# Altium PCB PCB_REV2.PcbDoc (part 2 of 2)
Units mm, origin at the board's own origin, x right, y up, seen from the top; angles counter-clockwise.
Board outline 152.4 x 101.6 mm, 2 copper layers (Top Layer, Bottom Layer); 215 components, 186 nets, 583 pads, 0 vias.
Unrouted connection lines stored in the file: 258.
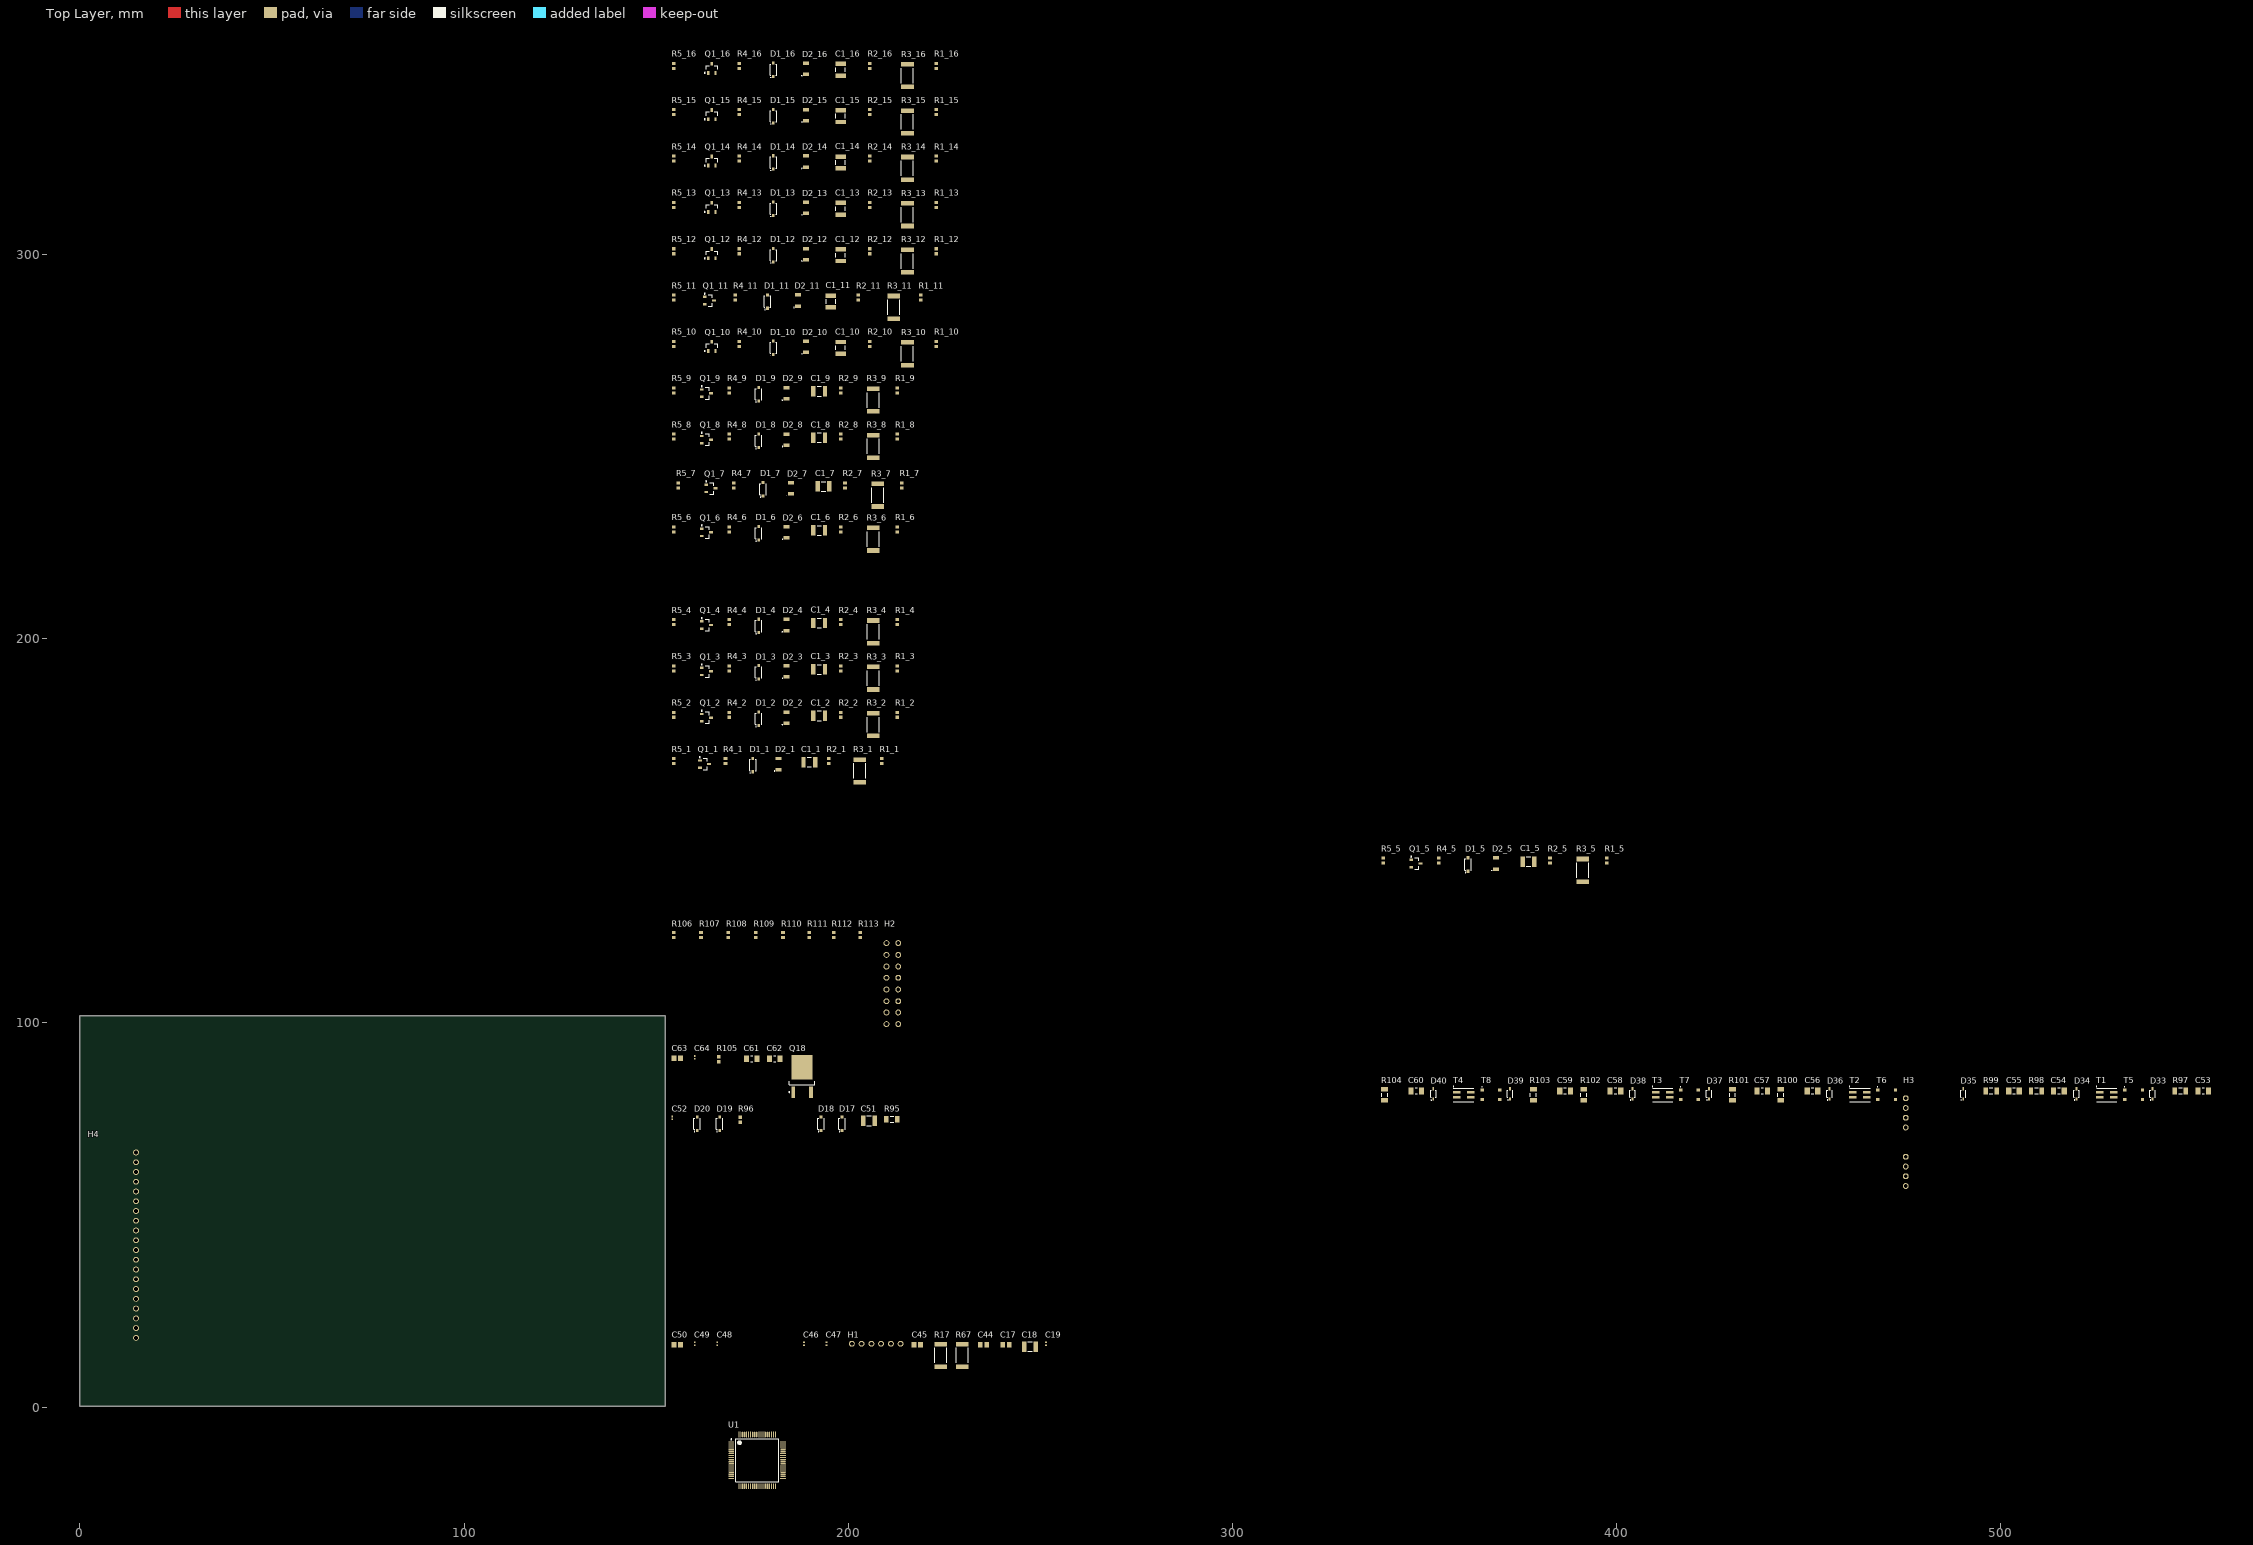
[diagram p0: Top Layer view]

## Part data (continued)
R1_1 R1_2 R1_3 R1_4 R1_5 R1_6 R1_7 R1_8 R1_9 R1_10 R1_11 R1_12 R1_13 R1_14 R1_15 R1_16 R2_1 R2_2 R2_3 R2_4 R2_5 R2_6 R2_7 R2_8 R2_9 R2_10 R2_11 R2_12 R2_13 R2_14 R2_15 R2_16 R96: "Resistor", Case/Package=0603, Case Code (Metric)=1608, Manufacturer="Vishay Dale", Manufacturer Part Number=CRCW06031K00FKEA, Max Operating Temperature=155°C, Max Power Dissipation=100mW, Min Operating Temperature=-55°C, Package Quantity=10, Resistance=1kR, Supplier Part Number 1=541-1.00KHCT-ND, Temperature Coefficient=100ppm/°C, Tolerance=1%, Voltage Rating=75V, Case Code (Imperial)=0603, Composition="Thick Film", Contact Plating=Tin, Depth=0.85mm, Features="Automotive AEC-Q200", Height=0.45mm, Lead Free="Lead Free", Length=1.55mm, Military Standard=Not, Mount="Surface Mount", Number of Pins=2, Number of Terminations=2, Packaging="Tape and Reel", Power Rating=100mW, Pricing 1="1=0.1, 10=0.042, 100=0.017, 1000=0.0076, 2500=0.0066 (USD)", Published=8-Jun-2000, Publisher="Altium Limited", Radiation Hardening=No, REACH SVHC=Unknown, Stock 1=0, Supplier 1=Digi-Key, Termination=SMD/SMT, Voltage Rating (DC)=75V, Weight=7.1E-05oz, Width=0.033inch
  R1_1 R1_2 R1_3 R1_4 R1_5 R1_6 R1_7 R1_8 R1_9 R1_10 R1_11 R1_12 R1_13 R1_14 R1_15 R1_16 R2_1 R2_2 R2_3 R2_4 R2_5 R2_6 R2_7 R2_8 R2_9 R2_10 R2_11 R2_12 R2_13 R2_14 R2_15 R2_16: LatestRevisionDate=17-Jul-2002, LatestRevisionNote="Re-released for DXP Platform.", PackageDescription="Axial Device, Thru-Hole; 2 Leads; 0.3 in Pin Spacing", PackageReference=AXIAL-0.3
  R96: LatestRevisionDate=29-May-2009, LatestRevisionNote="IPC-7351 Footprint Added.", PackageDescription="Chip Resistor", PackageReference=J1-0603
R3_1 R3_2 R3_3 R3_4 R3_5 R3_6 R3_7 R3_8 R3_9 R3_10 R3_11 R3_12 R3_13 R3_14 R3_15 R3_16: "Resistor", Case/Package=2512, Case Code (Metric)=6432, Manufacturer="Vishay Dale", Manufacturer Part Number=CRCW251275R0FKEG, Max Operating Temperature=155°C, Max Power Dissipation=1W, Min Operating Temperature=-55°C, Package Quantity=2000, Resistance=75R, Supplier Part Number 1=541-75.0AFCT-ND, Temperature Coefficient=100ppm/°C, Tolerance=1%, Voltage Rating=500V, Case Code (Imperial)=2512, Composition="Thick Film", Contact Plating=Tin, Depth=3.15mm, Features="Automotive AEC-Q200", Height=0.6mm, LatestRevisionDate=17-Jul-2002, LatestRevisionNote="Re-released for DXP Platform.", Lead Free="Lead Free", Length=6.3mm, Military Standard=Not, Mount="Surface Mount", Number of Terminations=2, PackageDescription="Axial Device, Thru-Hole; 2 Leads; 0.3 in Pin Spacing", PackageReference=AXIAL-0.3, Packaging="Tape and Reel", Power Rating=1W, Pricing 1="1=0.39, 10=0.333, 100=0.1301, 1000=0.0545 (USD)", Published=8-Jun-2000, Publisher="Altium Limited", Radiation Hardening=No, REACH SVHC=Unknown, Stock 1=32000, Supplier 1=Digi-Key, Termination=SMD/SMT, Voltage Rating (DC)=500V, Weight=0.001429oz, Width=3.15mm
R4_1 R4_2 R4_3 R4_4 R4_5 R4_6 R4_7 R4_8 R4_9 R4_10 R4_11 R4_12 R4_13 R4_14 R4_15 R4_16: "Resistor", Case/Package=0603, Case Code (Metric)=1608, Manufacturer=Vishay, Manufacturer Part Number=CRCW06032K00FKEA, Max Operating Temperature=155°C, Max Power Dissipation=100mW, Min Operating Temperature=-55°C, Package Quantity=10, Resistance=2kR, Supplier Part Number 1=541-2.00KHCT-ND, Temperature Coefficient=100ppm/°C, Tolerance=1%, Voltage Rating=75V, Case Code (Imperial)=0603, Composition="Thick Film", Contact Plating=Lead,Tin, Depth=0.85mm, Features="Automotive AEC-Q200", Height=0.45mm, LatestRevisionDate=17-Jul-2002, LatestRevisionNote="Re-released for DXP Platform.", Lead Free="Lead Free", Length=1.55mm, Military Standard=Not, Mount="Surface Mount", Number of Pins=2, Number of Terminations=2, PackageDescription="Axial Device, Thru-Hole; 2 Leads; 0.3 in Pin Spacing", PackageReference=AXIAL-0.3, Packaging="Tape and Reel", Power Rating=100mW, Pricing 1="1=0.1, 10=0.042, 100=0.017, 1000=0.0076, 2500=0.0066 (USD)", Published=8-Jun-2000, Publisher="Altium Limited", Radiation Hardening=No, REACH SVHC=Unknown, Stock 1=507412, Supplier 1=Digi-Key, Termination=Solder, Voltage Rating (DC)=75V, Weight=7.1E-05oz, Width=0.85mm
R5_1 R5_2 R5_3 R5_4 R5_5 R5_6 R5_7 R5_8 R5_9 R5_10 R5_11 R5_12 R5_13 R5_14 R5_15 R5_16: "Resistor", Case/Package=0603, Case Code (Metric)=1608, Manufacturer=Yageo, Manufacturer Part Number=RC0603FR-07100KL, Max Operating Temperature=155°C, Min Operating Temperature=-55°C, Power Rating=100mW, Resistance=100kR, Supplier Part Number 1=311-100KHRCT-ND, Temperature Coefficient=100ppm/°C, Tolerance=1%, Voltage Rating=50V, Working Voltage=75V, Case Code (Imperial)=0603, Composition="Thick Film", Depth=0.8mm, Height=0.45mm, LatestRevisionDate=17-Jul-2002, LatestRevisionNote="Re-released for DXP Platform.", Lead Free="Lead Free", Length=1.6mm, Military Standard=Not, Number of Pins=2, Number of Terminations=2, PackageDescription="Axial Device, Thru-Hole; 2 Leads; 0.3 in Pin Spacing", PackageReference=AXIAL-0.3, Packaging="Tape and Reel", Pricing 1="1=0.1, 10=0.032, 100=0.0131, 1000=0.0059, 2500=0.0051 (USD)", Published=8-Jun-2000, Publisher="Altium Limited", REACH SVHC="No SVHC", Stock 1=0, Supplier 1=Digi-Key, Termination=SMD/SMT, Voltage Rating (DC)=50V, Width=0.8mm
R17 R67: "Resistor", Case/Package=2512, Case Code (Metric)=6432, Manufacturer="Vishay Dale", Manufacturer Part Number=CRCW2512200RJNEG, Max Operating Temperature=155°C, Max Power Dissipation=1W, Min Operating Temperature=-55°C, Package Quantity=2000, Resistance=200R, Supplier Part Number 1=541-200XCT-ND, Temperature Coefficient=200ppm/°C, Tolerance=5%, Voltage Rating=500V, Case Code (Imperial)=2512, Composition="Thick Film", Contact Plating=Tin, Depth=3.15mm, Features="Automotive AEC-Q200", Height=0.6mm, LatestRevisionDate=29-May-2009, LatestRevisionNote="IPC-7351 Footprint Added.", Lead Free="Lead Free", Length=6.3mm, Military Standard=Not, Mount="Surface Mount", Number of Pins=2, Number of Terminations=2, PackageDescription="Chip Resistor", PackageReference=J1-0603, Packaging="Tape and Reel", Power Rating=1W, Pricing 1="1=0.39, 10=0.333, 100=0.1301, 1000=0.0545 (USD)", Published=8-Jun-2000, Publisher="Altium Limited", Radiation Hardening=No, REACH SVHC=Unknown, Stock 1=1091, Supplier 1=Digi-Key, Termination=SMD/SMT, Voltage Rating (DC)=500V, Weight=0.001429oz, Width=0.124inch, Working Voltage=500V
R95: "Resistor", Case/Package=1206, Case Code (Metric)=3216, Manufacturer="Vishay Dale", Manufacturer Part Number=CRCW1206100RFKEA, Max Operating Temperature=155°C, Min Operating Temperature=-55°C, Package Quantity=5000, Power Rating=250mW, Resistance=100R, Supplier Part Number 1=541-100FCT-ND, Temperature Coefficient=100ppm/°C, Tolerance=1%, Voltage Rating=200V, Case Code (Imperial)=1206, Composition="Thick Film", Contact Plating=Tin, Depth=1.6mm, Height=0.55mm, LatestRevisionDate=29-May-2009, LatestRevisionNote="IPC-7351 Footprint Added.", Lead Free="Lead Free", Length=3.2mm, Military Standard=Not, Mount="Surface Mount", Number of Pins=2, PackageDescription="Chip Resistor", PackageReference=J1-0603, Packaging="Tape and Reel", Pricing 1="1=0.1, 10=0.075, 100=0.0304, 1000=0.0136, 2500=0.0118 (USD)", Published=8-Jun-2000, Publisher="Altium Limited", Radiation Hardening=No, REACH SVHC=Unknown, Stock 1=0, Supplier 1=Digi-Key, Termination=SMD/SMT, Voltage Rating (DC)=200V, Weight=0.000353oz, Width=1.6mm
R97 R98 R99 R100 R101 R102 R103 R104: "Resistor", Case/Package=1206, Case Code (Metric)=3216, Manufacturer=Vishay, Manufacturer Part Number=CRCW120610R0FKEA, Max Operating Temperature=155°C, Max Power Dissipation=250mW, Min Operating Temperature=-55°C, Package Quantity=10, Resistance=10R, Supplier Part Number 1=541-10.0FCT-ND, Temperature Coefficient=100ppm/°C, Tolerance=1%, Voltage Rating=200V, Case Code (Imperial)=1206, Composition="Thick Film", Contact Plating=Lead,Tin, Depth=1.6mm, Features="Automotive AEC-Q200", Height=0.55mm, LatestRevisionDate=29-May-2009, LatestRevisionNote="IPC-7351 Footprint Added.", Lead Free="Lead Free", Length=3.2mm, Military Standard=Not, Number of Pins=2, Number of Terminations=2, PackageDescription="Chip Resistor", PackageReference=J1-0603, Packaging="Tape and Reel", Power Rating=250mW, Pricing 1="1=0.1, 10=0.075, 100=0.0304, 1000=0.0136, 2500=0.0118 (USD)", Published=8-Jun-2000, Publisher="Altium Limited", Radiation Hardening=No, REACH SVHC=Unknown, Stock 1=0, Supplier 1=Digi-Key, Termination=SMD/SMT, Voltage Rating (DC)=200V, Weight=0.000353oz, Width=0.063inch
R105: "Resistor", Case/Package=0603, Case Code (Metric)=1608, Manufacturer=Yageo, Manufacturer Part Number=RC0603FR-071RL, Max Operating Temperature=155°C, Max Power Dissipation=100mW, Min Operating Temperature=-55°C, Package Quantity=1, Resistance=1R, Supplier Part Number 1=311-1.00HRCT-ND, Temperature Coefficient=200ppm/°C, Tolerance=1%, Voltage Rating=50V, Case Code (Imperial)=0603, Composition="Thick Film", Depth=0.8mm, Features="Moisture Resistant", Height=0.022inch, LatestRevisionDate=29-May-2009, LatestRevisionNote="IPC-7351 Footprint Added.", Lead Free="Lead Free", Length=0.063inch, Number of Pins=2, Number of Terminations=2, PackageDescription="Chip Resistor", PackageReference=J1-0603, Packaging="Tape and Reel", Power Rating=100mW, Pricing 1="1=0.1, 10=0.053, 100=0.0214, 1000=0.0096, 2500=0.0083 (USD)", Published=8-Jun-2000, Publisher="Altium Limited", REACH SVHC=Unknown, Stock 1=0, Supplier 1=Digi-Key, Termination=SMD/SMT, Voltage Rating (DC)=50V, Width=0.031inch
R106 R107 R108 R109 R110 R111 R112 R113: "Resistor", Case/Package=0603, Case Code (Metric)=1608, Manufacturer=Vishay, Manufacturer Part Number=CRCW060310K0FKEA, Max Operating Temperature=155°C, Max Power Dissipation=100mW, Min Operating Temperature=-55°C, Package Quantity=10, Resistance=10kR, Supplier Part Number 1=541-10.0KHCT-ND, Temperature Coefficient=100ppm/°C, Tolerance=1%, Voltage Rating=75V, Case Code (Imperial)=0603, Composition="Thick Film", Contact Plating=Lead,Tin, Depth=0.85mm, Features="Automotive AEC-Q200", Height=0.45mm, LatestRevisionDate=29-May-2009, LatestRevisionNote="IPC-7351 Footprint Added.", Lead Free="Lead Free", Length=1.55mm, Military Standard=Not, Number of Pins=2, Number of Terminations=2, PackageDescription="Chip Resistor", PackageReference=J1-0603, Packaging="Tape and Reel", Power Rating=100mW, Pricing 1="1=0.1, 10=0.042, 100=0.017, 1000=0.0076, 2500=0.0066 (USD)", Published=8-Jun-2000, Publisher="Altium Limited", Radiation Hardening=No, REACH SVHC=Unknown, Stock 1=0, Supplier 1=Digi-Key, Termination=SMD/SMT, Voltage Rating (DC)=75V, Weight=7.1E-05oz, Width=0.033inch
U1: Case/Package=TQFP, Manufacturer="Texas Instruments", Manufacturer Part Number=BQ76PL455ATPFCRQ1, Max Operating Temperature=105°C, Min Operating Temperature=-40°C, Operating Supply Voltage=22V, Supplier Part Number 1=296-44049-1-ND, Fault Protection="Over/Under Voltage", Interface=UART, Lead Free="Lead Free", Mount="Surface Mount", Number of Pins=80, Packaging="Tape and Reel", Pricing 1="1=19.03, 10=17.486, 100=14.7676, 500=13.1368 (USD)", Stock 1=0, Supplier 1=Digi-Key

## Nets (pads, with @x,y where several pads share a name; then routed paths per layer and width w, separated by ;. In a path a pad name is that pad's centre, name@x,y a point inside that pad or via, vN(x,y) a via of type N, cw(c..) or ccw(c..) an arc to the next point about the centre after c; other vN are vias at no path point)
3.3V: R106.1 R107.1 R108.1 R109.1 R110.1 R111.1 R112.1 R113.1
AUX0: U1.66
AUX1: U1.65
AUX2: U1.64
AUX3: U1.63
AUX4: U1.62
AUX5: U1.61
AUX6: U1.60
AUX7: U1.59
CELL0: H4.3 Q1_1.2 R5_1.1
CELL1: H4.4 Q1_2.2 R1_1.2 R2_1.2 R3_1.1 R5_2.1
CELL2: H4.5 Q1_3.2 R1_2.2 R2_2.2 R3_2.1 R5_3.1
CELL3: H4.6 Q1_4.2 R1_3.2 R2_3.2 R3_3.1 R5_4.1
CELL4: H4.7 Q1_5.2 R1_4.2 R2_4.2 R3_4.1 R5_5.1
CELL5: H4.8 Q1_6.2 R1_5.2 R2_5.2 R3_5.1 R5_6.1
CELL6: H4.9 Q1_7.2 R1_6.2 R2_6.2 R3_6.1 R5_7.1
CELL7: H4.10 Q1_8.2 R1_7.2 R2_7.2 R3_7.1 R5_8.1
CELL8: H4.11 Q1_9.2 R1_8.2 R2_8.2 R3_8.1 R5_9.1
CELL9: H4.12 Q1_10.2 R1_9.2 R2_9.2 R3_9.1 R5_10.1
CELL10: H4.13 Q1_11.2 R1_10.2 R2_10.2 R3_10.1 R5_11.1
CELL11: H4.14 Q1_12.2 R1_11.2 R2_11.2 R3_11.1 R5_12.1
CELL12: H4.15 Q1_13.2 R1_12.2 R2_12.2 R3_12.1 R5_13.1
CELL13: H4.16 Q1_14.2 R1_13.2 R2_13.2 R3_13.1 R5_14.1
CELL14: H4.17 Q1_15.2 R1_14.2 R2_14.2 R3_14.1 R5_15.1
CELL15: H4.18 Q1_16.2 R1_15.2 R2_15.2 R3_15.1 R5_16.1
CELL16: H4.19 R1_16.2 R2_16.2 R3_16.1
CHM: C48.2 U1.33
COMMH+: U1.55
COMMH-: U1.54
COMML+: U1.52
COMML-: U1.53
EQ1: U1.28
EQ2: U1.26
EQ3: U1.24
EQ4: U1.22
EQ5: U1.20
EQ6: U1.18
EQ7: U1.16
EQ8: U1.14
EQ9: U1.12
EQ10: U1.10
EQ11: U1.8
EQ12: U1.6
EQ13: U1.4
EQ14: U1.2
EQ15: U1.80
EQ16: U1.78
FAULT_N: H1.4 U1.40
FAULTH+: U1.57
FAULTH-: U1.56
FAULTL+: U1.50
FAULTL-: U1.51
GND: C17.1 C18.1 C19.1 C44.1 C45.2 C46.1 C47.1 C49.2 C50.2 H1.1 U1.30 U1.35 U1.37 U1.48 U1.69 U1.72 U1.74
H3COMMH+: C55.2 H3.6
H3COMML+: C58.2 H3.3
H3COMML-: C56.2 H3.5
H3FAULTH+: C53.2 H3.8
H3FAULTH-: C54.2 H3.7
H3FAULTL+: C60.2 H3.1
H3FAULTL-: C59.2 H3.2
NetC45_1: C45.1 U1.58
NetC48_1: C48.1 U1.32
NetC53_1: C53.1 T5.4
NetC54_1: C54.1 T5.3
NetC55_1: C55.1 T6.4
NetC56_1: C56.1 T6.3
NetC57_1: C57.1 T7.4
NetC57_2: C57.2 H3.4
NetC58_1: C58.1 T7.3
NetC59_1: C59.1 T8.4
NetC60_1: C60.1 T8.3
NetD2_1_1: D2_1.1 R2_1.1
NetD2_1_2: D2_1.2 Q1_1.3 R3_1.2
NetD2_2_1: D2_2.1 R2_2.1
NetD2_2_2: D2_2.2 Q1_2.3 R3_2.2
NetD2_3_1: D2_3.1 R2_3.1
NetD2_3_2: D2_3.2 Q1_3.3 R3_3.2
NetD2_4_1: D2_4.1 R2_4.1
NetD2_4_2: D2_4.2 Q1_4.3 R3_4.2
NetD2_5_1: D2_5.1 R2_5.1
NetD2_5_2: D2_5.2 Q1_5.3 R3_5.2
NetD2_6_1: D2_6.1 R2_6.1
NetD2_6_2: D2_6.2 Q1_6.3 R3_6.2
NetD2_7_1: D2_7.1 R2_7.1
NetD2_7_2: D2_7.2 Q1_7.3 R3_7.2
NetD2_8_1: D2_8.1 R2_8.1
NetD2_8_2: D2_8.2 Q1_8.3 R3_8.2
NetD2_9_1: D2_9.1 R2_9.1
NetD2_9_2: D2_9.2 Q1_9.3 R3_9.2
NetD2_10_1: D2_10.1 R2_10.1
NetD2_10_2: D2_10.2 Q1_10.3 R3_10.2
NetD2_11_1: D2_11.1 R2_11.1
NetD2_11_2: D2_11.2 Q1_11.3 R3_11.2
NetD2_12_1: D2_12.1 R2_12.1
NetD2_12_2: D2_12.2 Q1_12.3 R3_12.2
NetD2_13_1: D2_13.1 R2_13.1
NetD2_13_2: D2_13.2 Q1_13.3 R3_13.2
NetD2_14_1: D2_14.1 R2_14.1
NetD2_14_2: D2_14.2 Q1_14.3 R3_14.2
NetD2_15_1: D2_15.1 R2_15.1
NetD2_15_2: D2_15.2 Q1_15.3 R3_15.2
NetD2_16_1: D2_16.1 R2_16.1
NetD2_16_2: D2_16.2 Q1_16.3 R3_16.2
NetD33_2: D33.2 R97.1
NetD34_2: D34.2 R98.1
NetD35_2: D35.2 R99.1
NetD36_2: D36.2 R100.1
NetD37_1: D37.1 D38.1
NetD37_2: D37.2 R101.1
NetD38_2: D38.2 R102.1
NetD39_2: D39.2 R103.1
NetD40_2: D40.2 R104.1
NetH2_2: H2.2 R112.2
NetH2_3: H2.3 R111.2
NetH2_8: H2.8 R106.2
NetQ1_1_1: Q1_1.1 R4_1.2 R5_1.2
NetQ1_2_1: Q1_2.1 R4_2.2 R5_2.2
NetQ1_3_1: Q1_3.1 R4_3.2 R5_3.2
NetQ1_4_1: Q1_4.1 R4_4.2 R5_4.2
NetQ1_5_1: Q1_5.1 R4_5.2 R5_5.2
NetQ1_6_1: Q1_6.1 R4_6.2 R5_6.2
NetQ1_7_1: Q1_7.1 R4_7.2 R5_7.2
NetQ1_8_1: Q1_8.1 R4_8.2 R5_8.2
NetQ1_9_1: Q1_9.1 R4_9.2 R5_9.2
NetQ1_10_1: Q1_10.1 R4_10.2 R5_10.2
NetQ1_11_1: Q1_11.1 R4_11.2 R5_11.2
NetQ1_12_1: Q1_12.1 R4_12.2 R5_12.2
NetQ1_13_1: Q1_13.1 R4_13.2 R5_13.2
NetQ1_14_1: Q1_14.1 R4_14.2 R5_14.2
NetQ1_15_1: Q1_15.1 R4_15.2 R5_15.2
NetQ1_16_1: Q1_16.1 R4_16.2 R5_16.2
NetR17_2: R17.2 R67.1
NetR97_2: R97.2 T1.1
NetR98_2: R98.2 T1.2
NetR99_2: R99.2 T2.1
NetR100_2: R100.2 T2.2
NetR101_2: R101.2 T3.1
NetR102_2: R102.2 T3.2
NetR103_2: R103.2 T4.1
NetR104_2: R104.2 T4.2
NetT1_3: T1.3 T5.2
NetT1_4: T1.4 T5.1
NetT2_3: T2.3 T6.2
NetT2_4: T2.4 T6.1
NetT3_3: T3.3 T7.2
NetT3_4: T3.4 T7.1
NetT4_3: T4.3 T8.2
NetT4_4: T4.4 T8.1
NetU1_36: U1.36
NetU1_42: U1.42
NetU1_43: U1.43
NetU1_44: U1.44
NetU1_45: U1.45
NetU1_46: U1.46
NetU1_47: U1.47
NetU1_75: U1.75
NPNB: U1.71
OUT1: C44.2 U1.73
OUT2: C17.2 U1.68
RX: H1.3 U1.39
TOP: C51.2 C61.1 D17.2 D18.1 H4.20 Q18.1 R67.2 R95.1 R95.2
TOP: 
TX: H1.2 U1.38
VDIG: C63.2 C64.2 R105.2 U1.34
VIO: C46.2 C47.2 H1.5 U1.41
VM: C49.1 C50.1 U1.31
VP: C62.2 Q18.3 R105.1 U1.70
VREF: C18.2 C19.2 U1.67
VSNS0: U1.29
VSNS1: U1.27
VSNS2: U1.25
VSNS3: U1.23
VSNS4: U1.21
VSNS5: U1.19
VSNS6: U1.17
VSNS7: U1.15
VSNS8: U1.13
VSNS9: U1.11
VSNS10: U1.9
VSNS11: U1.7
VSNS12: U1.5
VSNS13: U1.3
VSNS14: U1.1
VSNS15: U1.79
VSNS16: U1.77
WAKEUP: H1.6 U1.49
pads on no net: C1_1.1 C1_1.2 C1_2.1 C1_2.2 C1_3.1 C1_3.2 C1_4.1 C1_4.2 C1_5.1 C1_5.2 C1_6.1 C1_6.2 C1_7.1 C1_7.2 C1_8.1 C1_8.2 C1_9.1 C1_9.2 C1_10.1 C1_10.2 C1_11.1 C1_11.2 C1_12.1 C1_12.2 C1_13.1 C1_13.2 C1_14.1 C1_14.2 C1_15.1 C1_15.2 C1_16.1 C1_16.2 C51.1 C52.1 C52.2 C61.2 C62.1 C63.1 C64.1 D1_1.1 D1_1.2 D1_2.1 D1_2.2 D1_3.1 D1_3.2 D1_4.1 D1_4.2 D1_5.1 D1_5.2 D1_6.1 D1_6.2 D1_7.1 D1_7.2 D1_8.1 D1_8.2 D1_9.1 D1_9.2 D1_10.1 D1_10.2 D1_11.1 D1_11.2 D1_12.1 D1_12.2 D1_13.1 D1_13.2 D1_14.1 D1_14.2 D1_15.1 D1_15.2 D1_16.1 D1_16.2 D17.1 D18.2 D19.1 D19.2 D20.1 D20.2 D33.1 D34.1 D35.1 D36.1 D39.1 D40.1 H2.1 H2.4 H2.5 H2.6 H2.7 H2.9 H2.10 H2.11 H2.12 H2.13 H2.14 H2.15 H2.16 H4.1 H4.2 Q18.4 R1_1.1 R1_2.1 R1_3.1 R1_4.1 R1_5.1 R1_6.1 R1_7.1 R1_8.1 R1_9.1 R1_10.1 R1_11.1 R1_12.1 R1_13.1 R1_14.1 R1_15.1 R1_16.1 R4_1.1 R4_2.1 R4_3.1 R4_4.1 R4_5.1 R4_6.1 R4_7.1 R4_8.1 R4_9.1 R4_10.1 R4_11.1 R4_12.1 R4_13.1 R4_14.1 R4_15.1 R4_16.1 R17.1 R96.1 R96.2 R107.2 R108.2 R109.2 R110.2 R113.2 U1.76